# EAGLE board Proto_shield_REV3 (EAGLE 7.3.0)
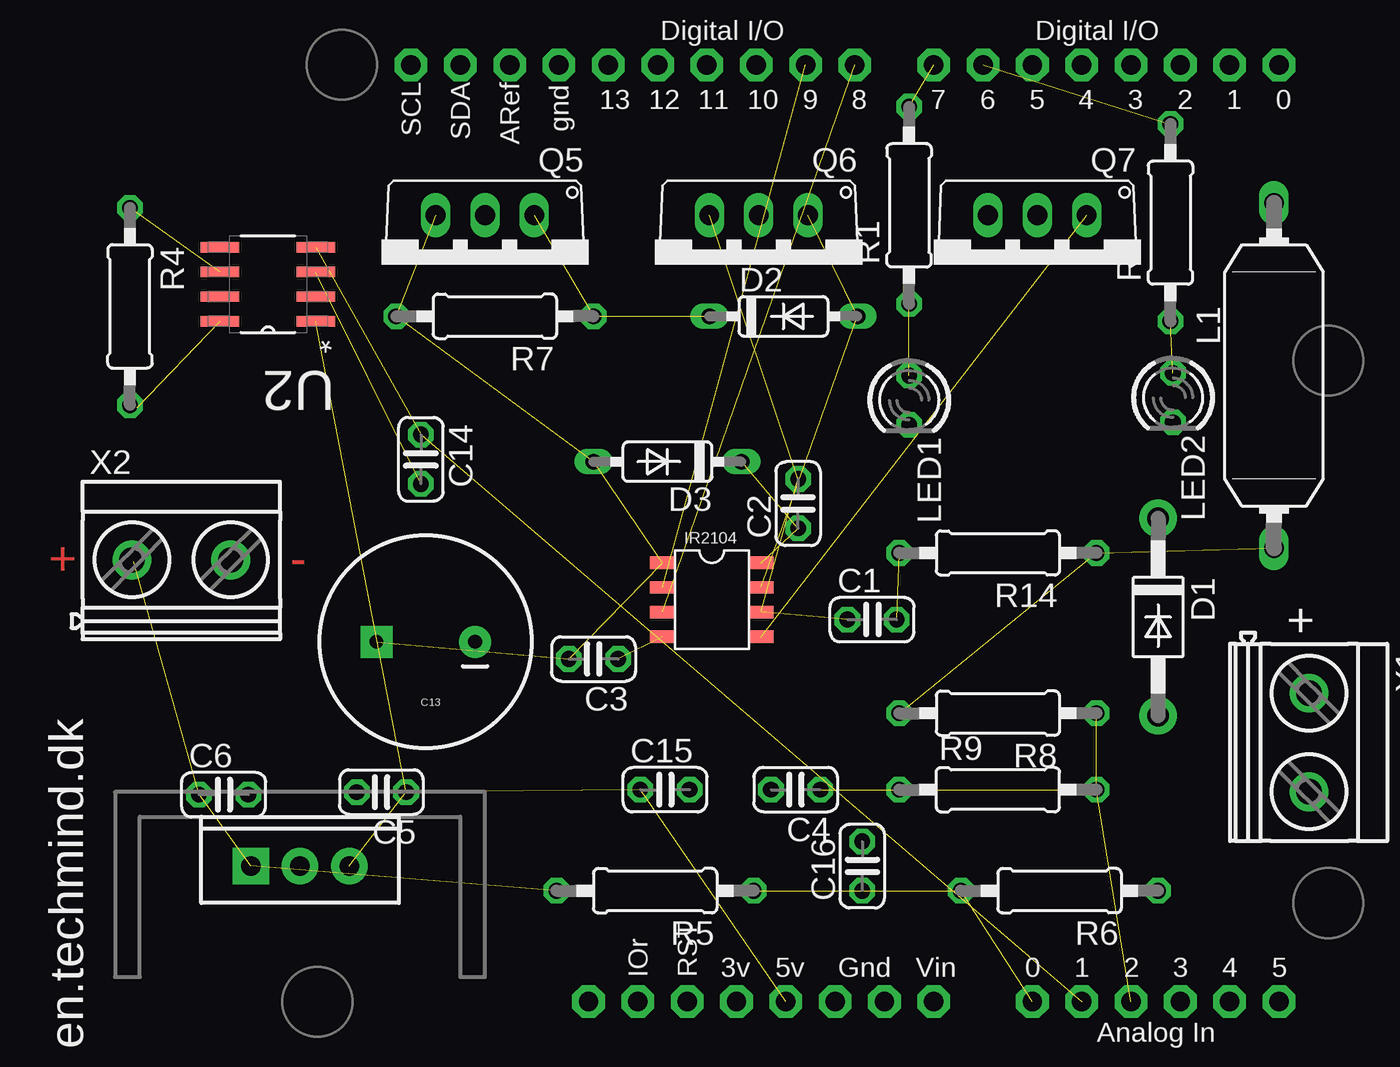
[diagram p0: board, top side]
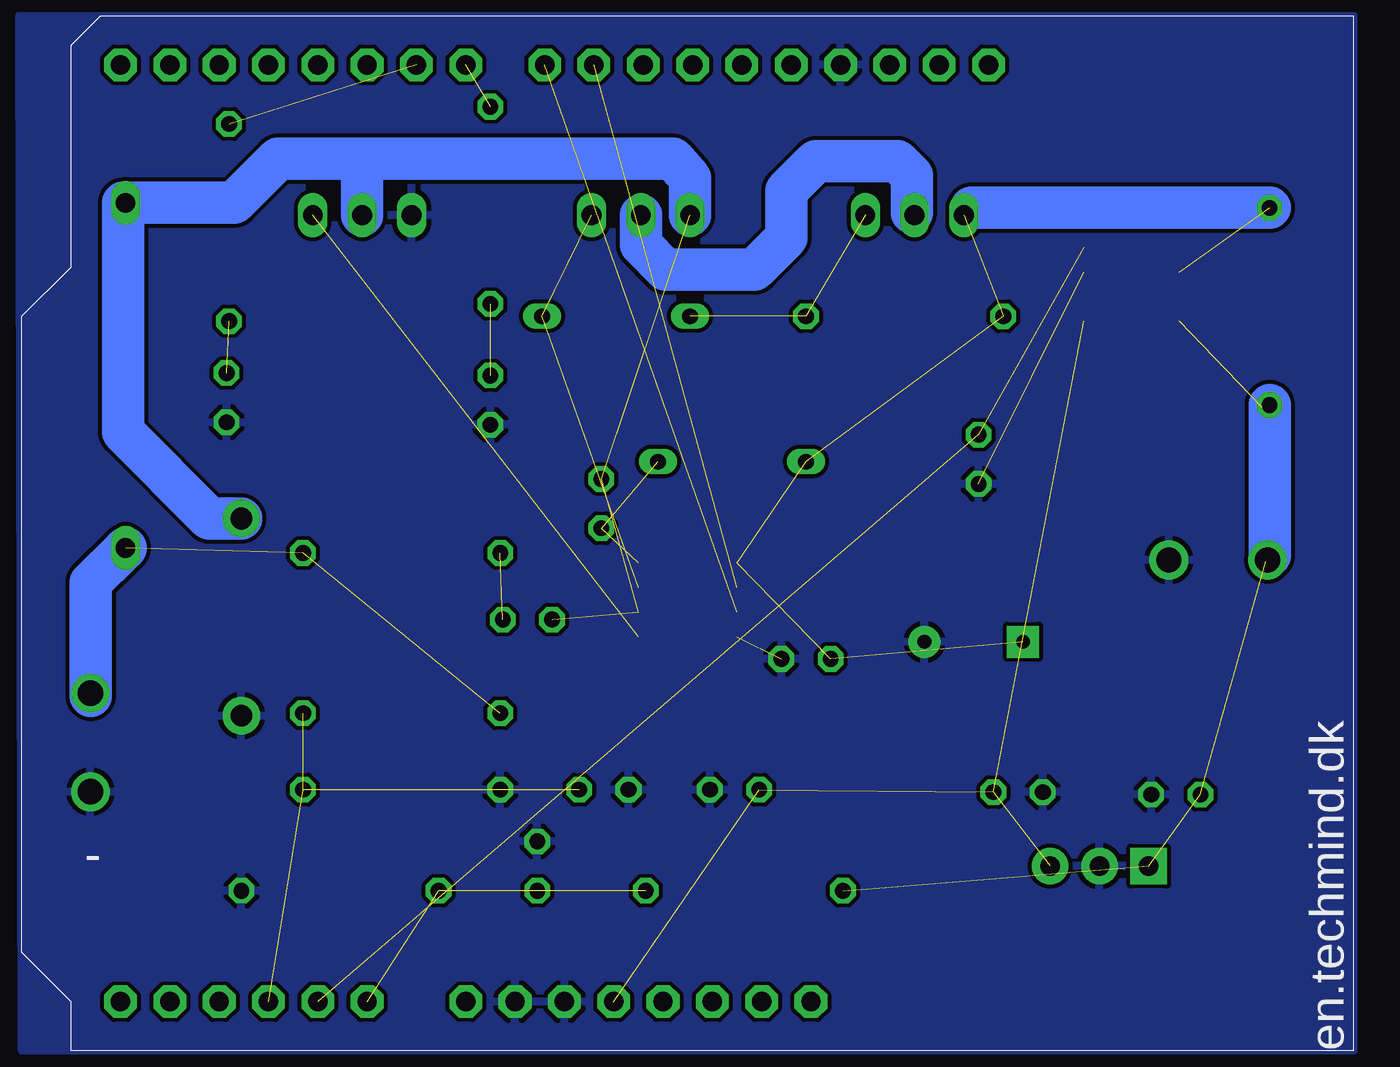
[diagram p1: board, bottom side, seen from below]

No outline drawn. Coordinates in mm, seen from the top.
Copper layers (1*16): Top 0.035mm / dielectric 1.5mm / Bottom 0.035mm
Design rules "default": minimum track width 10mil, minimum drill 24mil, track to track 8mil, track to pad 8mil, pad to pad 8mil, via to via 8mil, smd to smd 8mil, copper to edge 40mil, drill to drill 8mil, minimum pad ring 10mil, minimum via ring 8mil, stop-mask expansion 2mil, vias tented up to drill 0mil, thermal gap 10mil
Net classes: 0 default: width 0.508 mm

## Footprints (pad centres in the part's own frame; a part is rotated, then mirrored left to right if it is on the bottom)
C025-024X044 = drill 0.813 octagon: 1 -1.27,0; 2 1.27,0
CPOL-RADIAL-1000UF-25V = drill 0.7 pad 1.651 square: 1 2.54,0 | drill 0.7 pad 1.651: 2 -2.54,0
DO41-10 = drill 1.118 pad 1.93: A 5.08,0; C -5.08,0
DO35-7 = drill 0.813 long: A 3.81,0; C -3.81,0
TO220-IGO = drill 1 pad 1.88: GND 0,0; OUT 2.54,0 | drill 1 pad 1.88 square: IN -2.54,0
SUKW1-17 = drill 1.016 long: 1 -8.89,0; 2 8.89,0
LED3MM = drill 0.813 octagon: A -1.27,0; K 1.27,0
TO220V = drill 1.016 long: 1 -2.54,-2.54; 2 0,-2.54; 3 2.54,-2.54
0207/10 = drill 0.813 octagon: 1 -5.08,0; 2 5.08,0
ARDUINOR3-BPLACE = drill 1 pad 1.676 octagon: 3V 35.56,2.54; 5V 38.1,2.54; A0 50.8,2.54; A1 53.34,2.54; A2 55.88,2.54; A3 58.42,2.54; A4 60.96,2.54; A5 63.5,2.54; AREF 23.876,50.8; D0 63.5,50.8; D1 60.96,50.8; D2 58.42,50.8; D3 55.88,50.8; D4 53.34,50.8; D5 50.8,50.8; D6 48.26,50.8; D7 45.72,50.8; D8 41.656,50.8; D9 39.116,50.8; D10 36.576,50.8; D11 34.036,50.8; D12 31.496,50.8; D13 28.956,50.8; GND 26.416,50.8; GND1 43.18,2.54; GND2 40.64,2.54; IOREF 30.48,2.54; RESERVED 27.94,2.54; RESET 33.02,2.54; SCL 18.796,50.8; SDA 21.336,50.8; VIN 45.72,2.54
SOIC127P600X175-8N = smd 1.981 x 0.533: 1 -2.464,1.905; 2 -2.464,0.635; 3 -2.464,-0.635; 4 -2.464,-1.905; 5 2.464,-1.905; 6 2.464,-0.635; 7 2.464,0.635; 8 2.464,1.905
IR2104S = smd 1.27 x 0.635: 1 0,3.81; 2 0,2.54; 3 0,1.27; 4 0,0; 5 5.08,0; 6 5.08,1.27; 7 5.08,2.54; 8 5.08,3.81
MKDSN1,5/2-5,08 = drill 1.3 pad 2: 1 -2.561,0.025; 2 2.519,0.025

## Placement (x,y rotation side)
C1  100nF  [C025-024X044]  42.55,22.23 0 top
C2  100 nF  [C025-024X044]  38.73,28.19 90 top
C3  100 nF  [C025-024X044]  28.19,20.19 180 top
C4  100nF  [C025-024X044]  38.61,13.46 180 top
C5  100 nF  [C025-024X044]  17.27,13.34 180 top
C6  100 nF  [C025-024X044]  9.14,13.21 0 top
C13  100uF  [CPOL-RADIAL-1000UF-25V]  19.56,21.08 180 top
C14  100 nF  [C025-024X044]  19.3,30.48 270 top
C15  100 nF  [C025-024X044]  31.88,13.46 0 top
C16  100nF  [C025-024X044]  42.04,9.53 90 top
D1  UF4007  [DO41-10]  57.28,22.35 270 top
D2  1N4148  [DO35-7]  37.97,37.85 0 top
D3  1N4148  [DO35-7]  32,30.35 180 top
IC1  [TO220-IGO]  13.08,9.53 0 top
L1  33uH  [SUKW1-17]  63.25,34.8 270 top
LED1  [LED3MM]  44.45,33.53 270 top
LED2  [LED3MM]  58.04,33.66 270 top
Q5  [TO220V]  22.61,40.51 180 top
Q6  [TO220V]  36.7,40.51 180 top
Q7  [TO220V]  51.05,40.51 180 top
R1  [0207/10]  44.45,43.56 90 top
R2  [0207/10]  57.91,42.67 90 top
R4  0.005 ohm  [0207/10]  4.32,38.35 270 top
R5  10K 1%  [0207/10]  31.37,8.26 180 top
R6  2K2 1%  [0207/10]  52.2,8.26 180 top
R7  470K 1%  [0207/10]  23.11,37.85 180 top
R8  10K 1%  [0207/10]  49.02,17.4 180 top
R9  2K2 1%  [0207/10]  49.02,13.46 0 top
R14  200  [0207/10]  49.02,25.65 180 top
U1  ARDUINOR3-BPLACE  [ARDUINOR3-BPLACE]  0,0 0 top
U2  MAX4172ESA+  [SOIC127P600X175-8N]  11.43,39.5 180 top
U$1  IR2104S  [IR2104S]  31.75,21.34 0 top
X1  Battery 12 volt  [MKDSN1,5/2-5,08]  65.02,15.88 270 top
X2  Solarpanel 20 volt  [MKDSN1,5/2-5,08]  6.99,25.27 0 top

## Library data of the parts
C1-C6 C14-C16 R1 R2 R4-R9 R14 = rcl
C13 = SparkFun-Capacitors
D1 Q5-Q7 U1 = adafruit
D2 D3 = diode
IC1 = SparkFun-PowerIC
L1 = inductors
LED1 LED2 = led
U2 = Maxim_By_element14_Batch_1; MPN: MAX4172ESA+; OC_FARNELL: 9724117; OC_NEWARK: 68K4698; PACKAGE: SOIC-8; SUPPLIER: Maxim
U$1 = ir-2104
X1 X2 = con-phoenix-508; MPN: MKDSN 1,5/2-5.08; OC_FARNELL: 1792903; OC_NEWARK: 30M2397

## Nets
3V: U1.3V
GND: C3.1 C4.2 C5.2 C6.2 C13.2 C14.2 C15.2 C16.2 D1.A IC1.GND LED1.K LED2.K Q7.3 R6.1 R9.1 U1.GND U1.GND1 U1.GND2 U2.3 U$1.4 X1.2 X2.2
N$1: U1.D9 U$1.2
N$2: D2.C Q5.1 R7.1
N$3: C5.1 C15.1 IC1.OUT U1.5V U2.1
N$5: C16.1 R5.1 R6.2 U1.A0
N$6: C1.1 C2.2 D1.C L1.1 Q6.3 Q7.2 U$1.6
N$7: U1.D8 U$1.3
N$8: C1.2 R14.2
N$10: C4.1 R8.1 R9.2 U1.A2
N$11: Q5.2 Q6.2
N$12: Q7.1 U$1.5
N$13: C2.1 D3.C U$1.8
N$14: R2.2 U1.D6
N$16: C6.1 IC1.IN R4.2 R5.2 U2.8 X2.1
N$18: LED2.A R2.1
N$19: LED1.A R1.1
N$20: R1.2 U1.D7
N$24: L1.2 R8.2 R14.1 X1.1
N$25: C14.1 U1.A1 U2.4
N$27: D2.A Q6.1 U$1.7
N$30: C3.2 C13.1 D3.A Q5.3 R4.1 R7.2 U2.6 U$1.1
VIN: U1.VIN

## Tracks (layer width: path | path; a pad name or v marks a point on that pad's centre or on a via)
GND  (2 unrouted)
  pour Bottom: 0,53.34 0,0 68.58,0 68.71,53.34
N$1  (1 unrouted)
N$2  (2 unrouted)
N$3  (4 unrouted)
N$5  (3 unrouted)
N$6  (3 unrouted)
  Top 1.016: D1.C 57.28,27.18 57.15,27.05
  Bottom 2.184: Q7.2 51.05,45.97 | 51.05,45.97 55.37,45.97 57.66,43.69 L1.1 63.37,43.69 63.37,31.88 58.93,27.43 D1.C | Q6.3 34.16,44.96 35.05,45.97 51.05,45.97
N$7  (1 unrouted)
N$8  (1 unrouted)
N$10  (3 unrouted)
N$11
  Bottom 1.016: 22.73,43.18 Q5.2
  Bottom 2.184: Q6.2 36.7,41.53 35.43,40.26 30.86,40.26 29.21,41.91 29.21,44.32 27.69,45.85 23.5,45.85 22.73,45.09 22.73,43.18
N$12  (1 unrouted)
N$13  (2 unrouted)
N$14  (1 unrouted)
N$16  (4 unrouted)
  Top 0.406: R4.2 4.45,33.15 | 4.45,33.15 4.45,33.02 4.57,33.02 4.7,33.15 4.45,33.15
  Bottom 0.254: 4.45,25.4 4.52,25.22 X2.1 4.29,25.45 4.45,25.27
  Bottom 1.016: 4.45,33.15 R4.2 | 4.32,25.53 4.45,25.4
  Bottom 2.184: R4.2 4.32,25.53
N$18  (1 unrouted)
N$19  (1 unrouted)
N$20  (1 unrouted)
N$24  (2 unrouted)
  Bottom 0.254: X1.1 65.1,18.36 65.02,18.36
  Bottom 0.406: L1.2 63.37,25.91 63.37,25.78
  Bottom 2.184: L1.2 63.37,25.78 65.02,24.13 65.02,18.36 65.02,18.29
N$25  (2 unrouted)
N$27  (2 unrouted)
N$30  (6 unrouted)
  Top 0.406: R4.1 4.19,43.31
  Bottom 1.016: 19.68,43.43 Q5.3
  Bottom 2.184: R4.1 19.68,43.43

## Text on the board
Top: + | -
tNames: + | en.techmind.dk
bNames: en.techmind.dk | -